# Allegro board c3x.brd
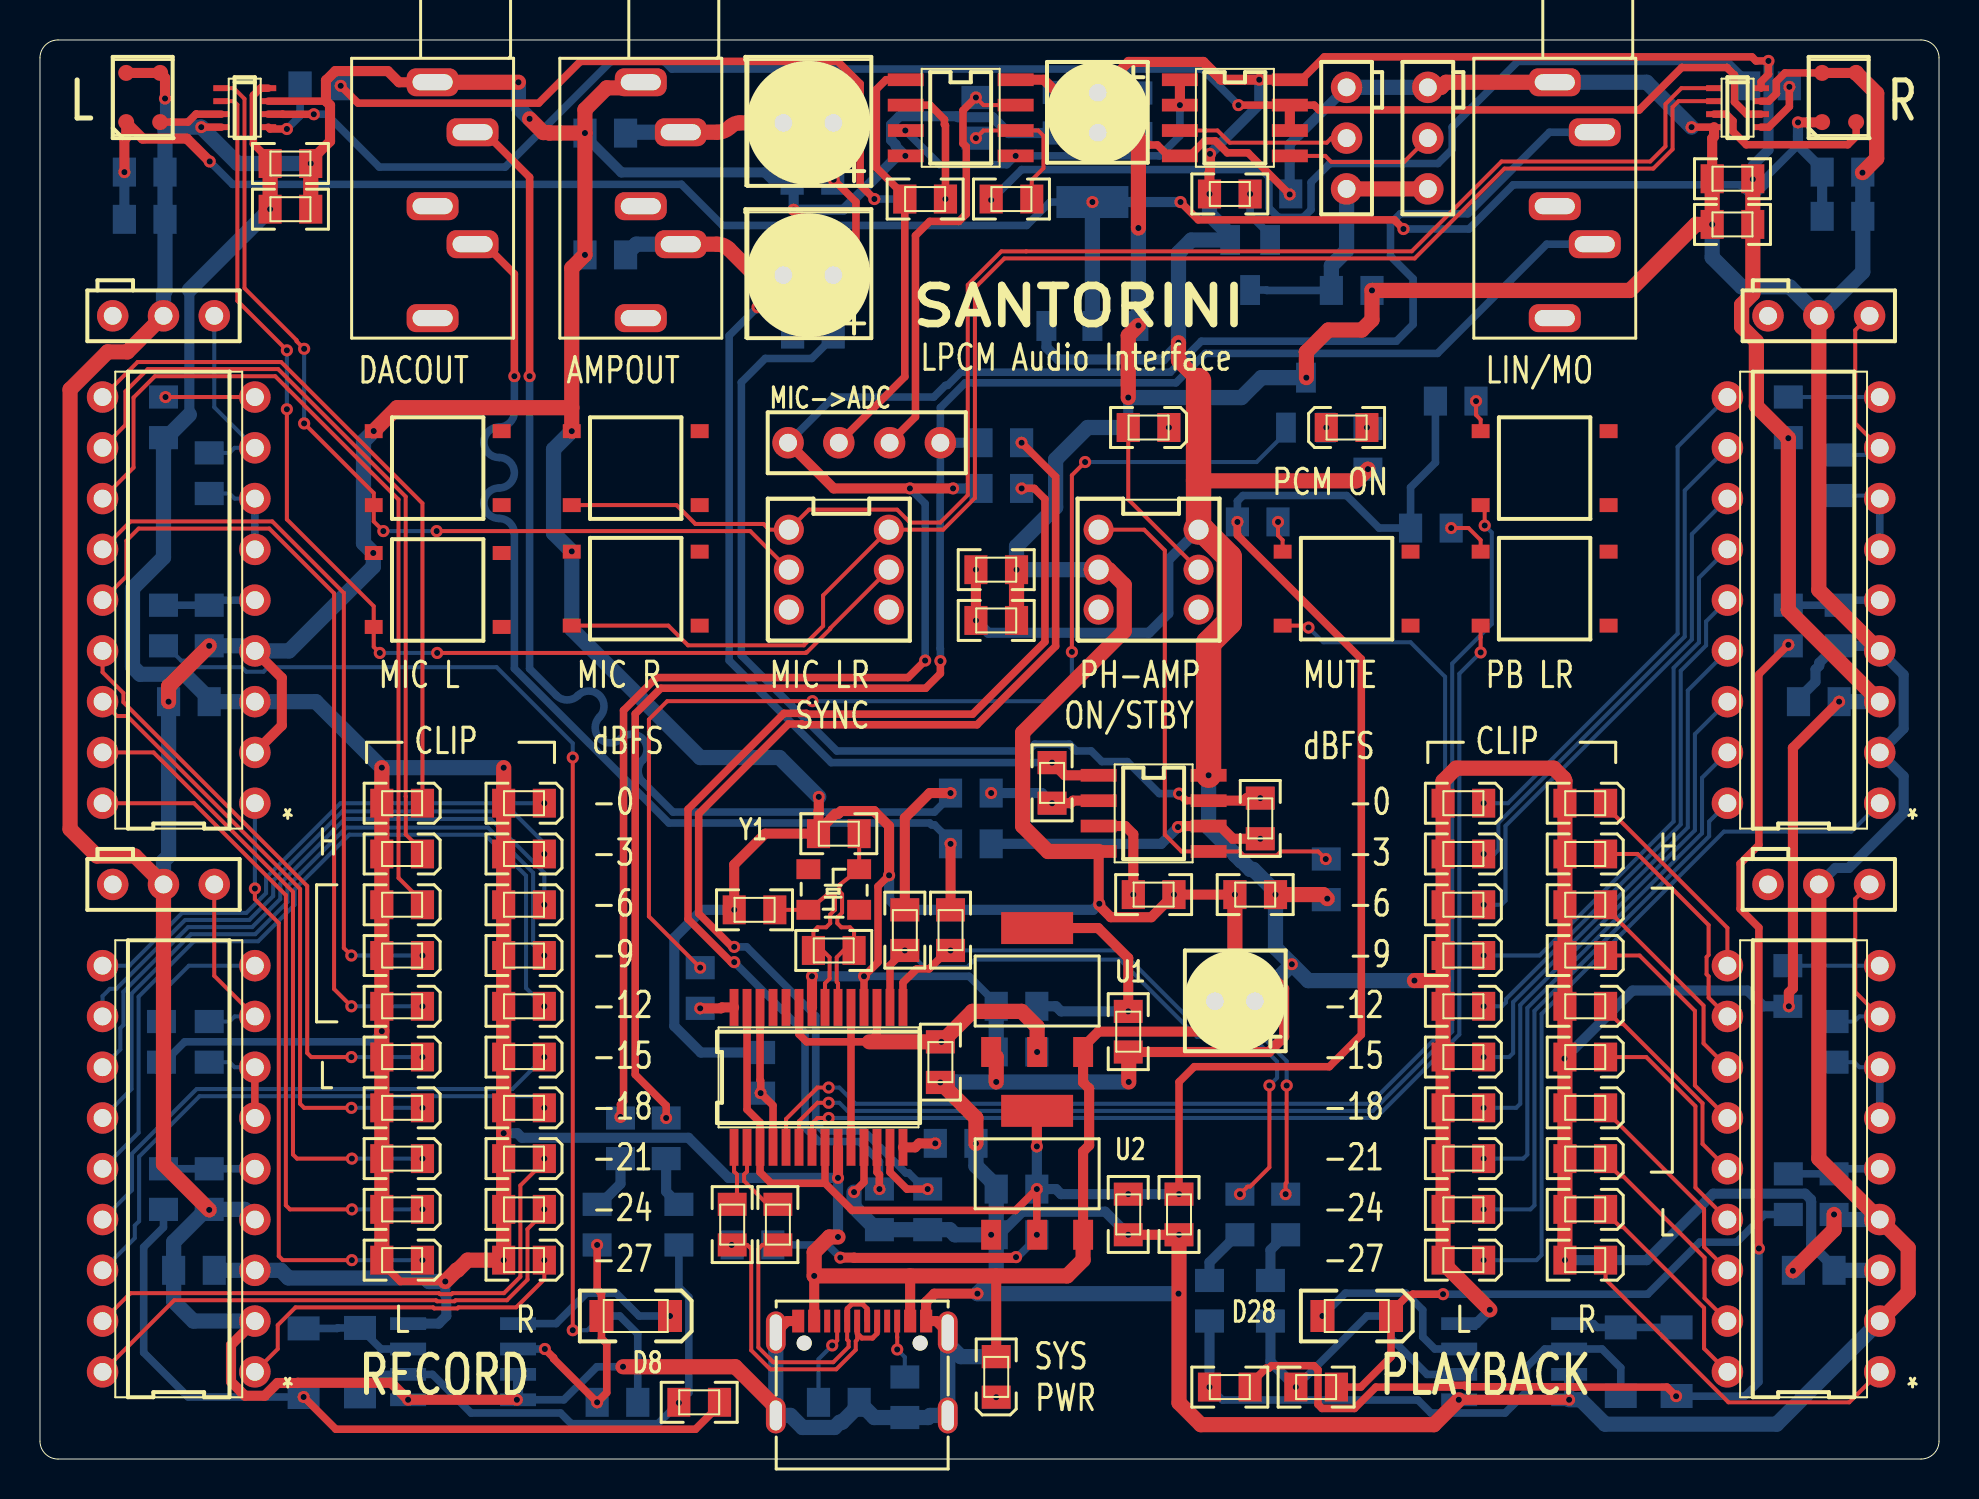
[diagram p0: board, top side]
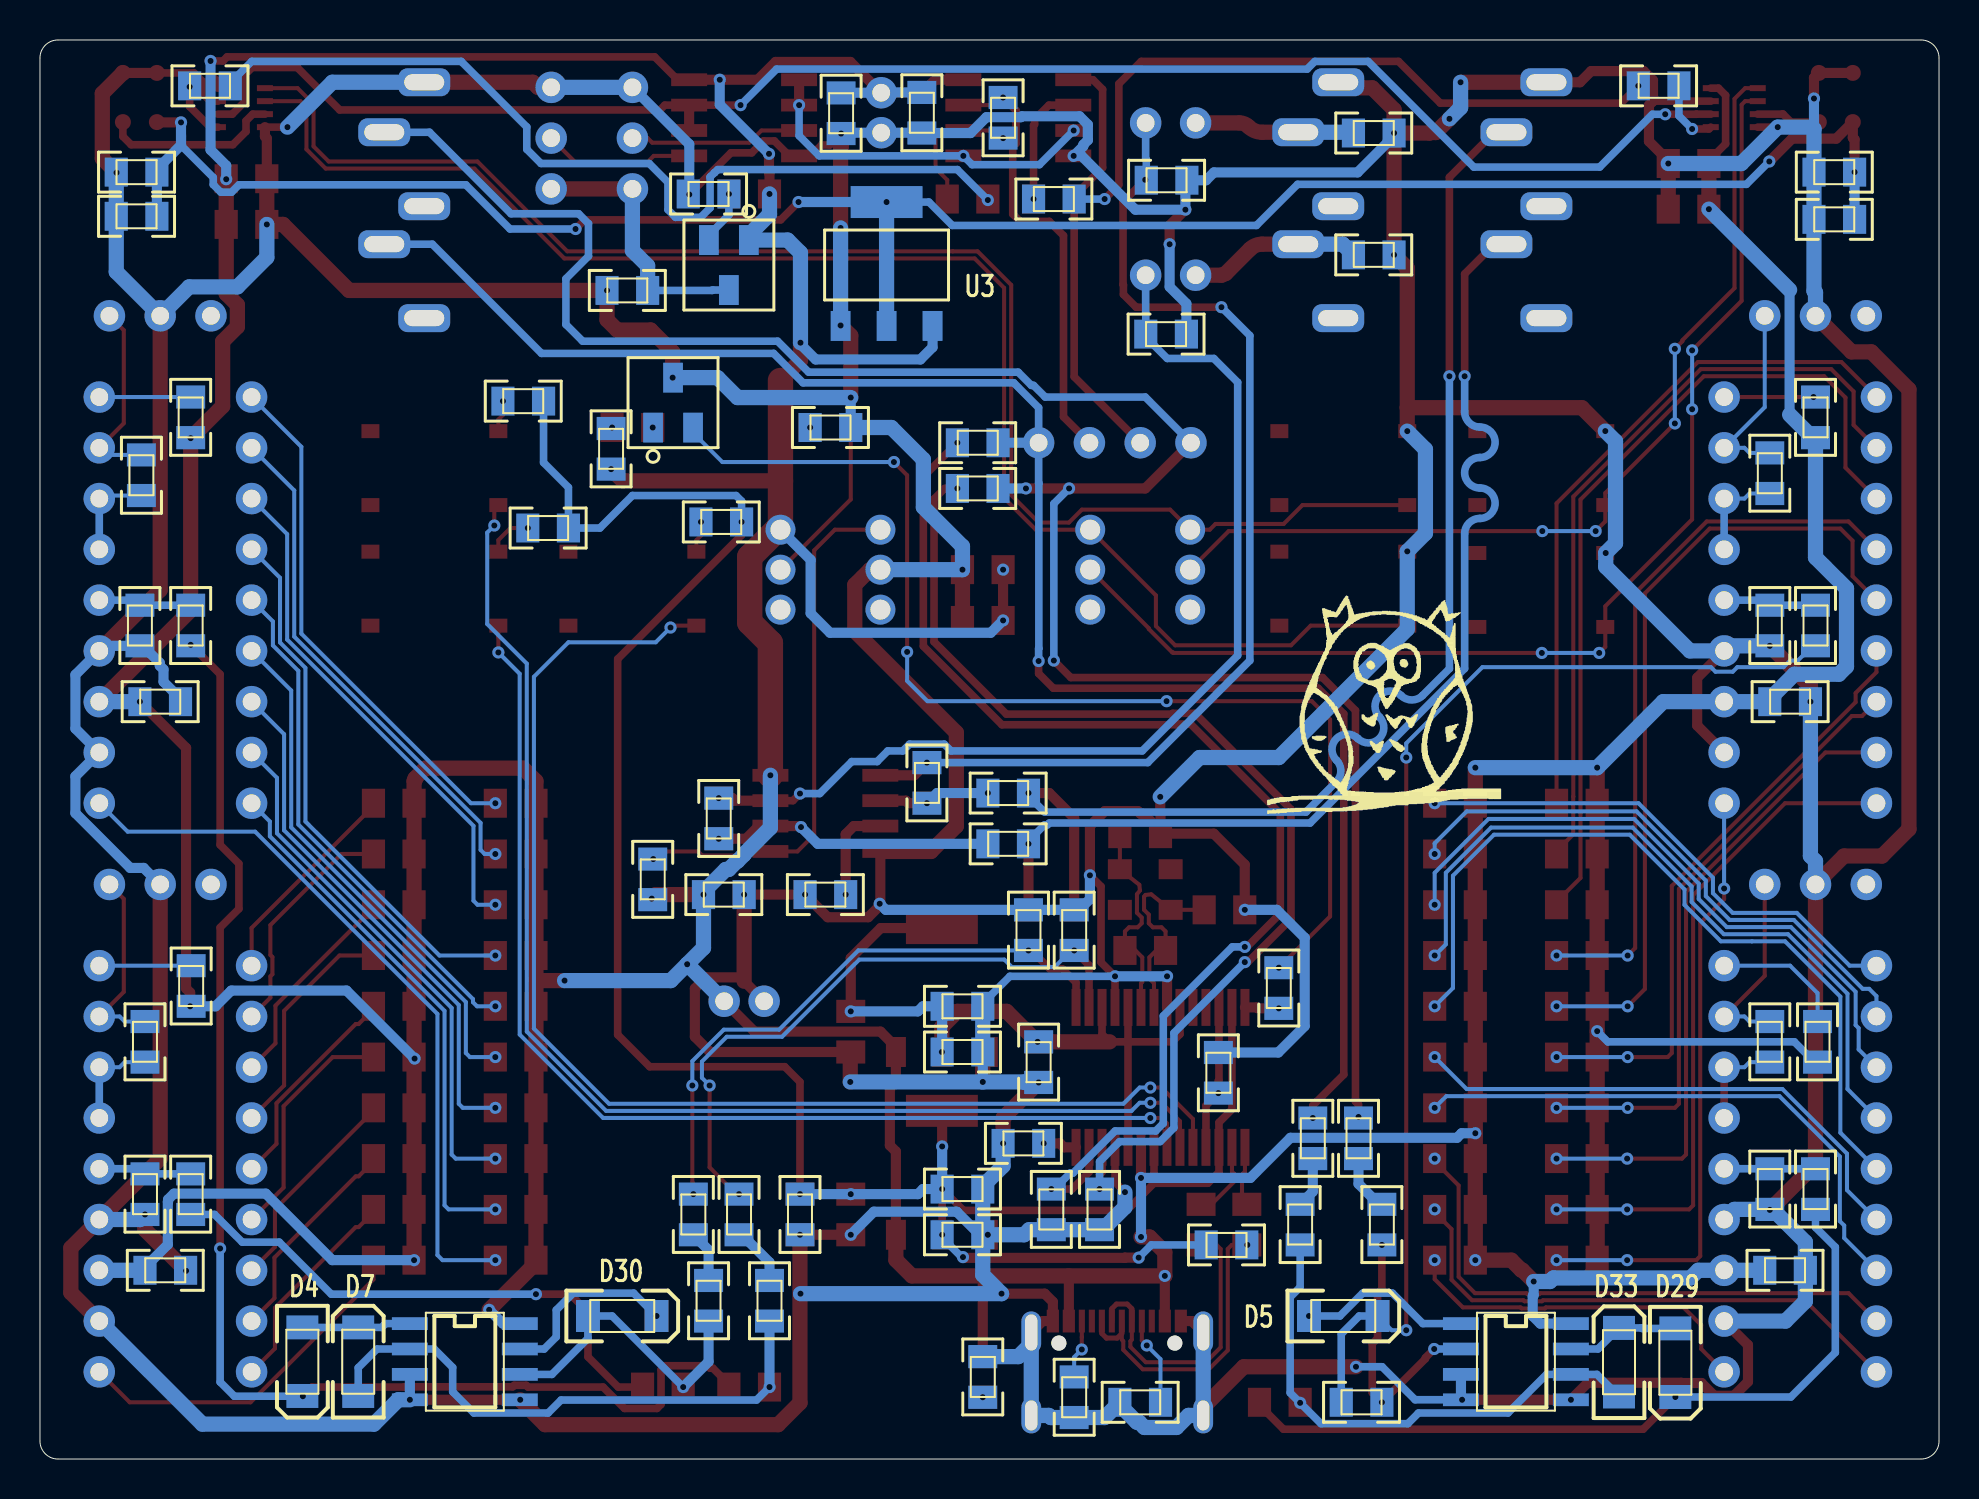
[diagram p1: board, bottom side, seen from below]

Outline 95 x 70.99 mm; copper layers: TOP, BOTTOM. Coordinates in mm from the lower left corner of the outline.
Outline path: 0,70.09 0,0.9 arc(0.26,0.26) 0.9,0 94.1,0 arc(94.73,0.26) 95,0.9 95,70.09 arc(94.73,70.73) 94.1,70.99 0.9,70.99 arc(0.26,70.73) 0,70.09

## Design rules (mm)
constraint set DEFAULT: min track width 0.203, pair gap 0.152
net group DP1: nets N368212 N368216
net group DP2: nets XTAL1 XTAL2
net group USB_D: nets USB_DN USB_DP

## Placement (name value [footprint] x y rotation side)
C1  5pF  [0805]  50.63 33.83 90 bottom
C3  1uF  [0805]  56.98 12.24 270 top
C4  0.1uF  [0805]  56.98 12.24 270 bottom
C5  220uF  [TH_CAP_D6_3]  38.44 66.85 180 top
C6  0.47uF  [0805]  43.26 26.46 90 top
C7  0.47uF  [0805]  45.55 26.46 90 top
C9  10uF  [0805]  54.44 21.38 270 top
C10  1uF  [0805]  45.04 19.86 270 top
C11  0.1uF  [0805]  45.04 19.86 270 bottom
C12  10uF  [0805]  48.85 20.36 180 bottom
C14  1uF  [0805]  48.85 22.65 180 bottom
C15  10uF  [0805]  48.85 11.22 180 bottom
C17  1uF  [0805]  48.85 13.51 180 bottom
C21  220uF  [TH_CAP_D6_3]  38.44 59.23 180 top
C22  10uF  [0805]  45.8 15.79 0 bottom
C23  30pF  [0805]  35.74 27.48 180 top
C24  5pF  [0805]  61.04 32.05 90 bottom
C25  10uF  [0805]  47.83 44.49 0 top
C26  10uF  [0805]  47.83 41.95 0 top
C31  30pF  [0805]  39.96 31.29 180 top
C32  1uF  [0805]  55.71 28.24 0 top
C33  0.1uF  [0805]  55.71 28.24 0 bottom
C34  100uF  [TH_CAP_D5]  59.77 22.9 180 top
C35  1uF  [0805]  60.79 28.24 180 bottom
C36  0.1uF  [0805]  60.79 28.24 180 top
C37  0.47uF  [0805]  14.03 68.7 0 bottom
C39  10uF  [0805]  61.55 63.29 0 bottom
C40  22uF  [0805]  65.61 58.46 0 bottom
C41  0.47uF  [0805]  48.09 48.56 0 bottom
C42  4.7uF  [0805]  90.16 64.38 0 bottom
C44  0.1uF  [0805]  90.16 62.17 0 bottom
C45  4.7uF  [0805]  12.53 64.81 0 top
C47  0.1uF  [0805]  12.53 62.53 0 top
C48  1uF  [0805]  54.92 67.33 270 bottom
C49  1uF  [0805]  50.88 67.35 270 bottom
C51  100uF  [TH_CAP_D5]  52.91 67.35 270 top
C54  0.47uF  [0805]  86.49 68.7 180 bottom
C55  0.47uF  [0805]  48.09 50.84 0 bottom
C60  4.7uF  [0805]  5.24 64.38 0 bottom
C62  0.1uF  [0805]  5.24 62.02 0 bottom
C63  4.7uF  [0805]  84.66 64.05 180 top
C65  0.1uF  [0805]  84.66 61.77 180 top
C66  1uF  [0805]  90 41.7 90 bottom
C67  1uF  [0805]  60.03 12.24 270 bottom
C68  1uF  [0805]  8.46 41.7 90 bottom
C69  1uF  [0805]  29.04 16.05 270 bottom
C70  1uF  [0805]  89.74 13.25 90 bottom
C71  1uF  [0805]  8.46 13.51 90 bottom
C72  1uF  [0805]  62.31 12.24 270 bottom
C73  1uF  [0805]  31.32 16.05 270 bottom
C74  0.1uF  [0805]  7.45 37.89 180 bottom
C75  1uF  [0805]  7.7 9.44 180 bottom
C78  0.1uF  [0805]  88.73 9.44 180 bottom
C79  1uF  [0805]  88.98 37.89 180 bottom
C81  10uF  [0805]  54.44 12.24 270 top
D1  PCM_ON  [0805D]  65.36 51.61 180 top
D2  AMP_ON  [0805D]  55.45 51.61 0 top
D3  PWR  [0805D]  47.83 4.11 270 top
D4  1N4148  [1206]  81.87 4.87 270 bottom
D5  1N4148  [1206]  29.8 7.16 180 bottom
D6  GRN  [0805D]  71.2 9.95 0 top
D7  1N4148  [1206]  79.08 4.87 90 bottom
D8  1N4148  [1206]  29.8 7.16 0 top
D9  GRN  [0805D]  71.2 12.49 0 top
D10  GRN  [0805D]  18.12 9.95 0 top
D11  GRN  [0805D]  18.12 12.49 0 top
D12  GRN  [0805D]  71.2 15.03 0 top
D13  GRN  [0805D]  18.12 15.03 0 top
D14  GRN  [0805D]  71.2 17.57 0 top
D15  GRN  [0805D]  18.12 17.57 0 top
D16  GRN  [0805D]  71.2 20.11 0 top
D17  GRN  [0805D]  18.12 20.11 0 top
D18  GRN  [0805D]  71.2 22.65 0 top
D19  GRN  [0805D]  18.12 22.65 0 top
D20  ORG  [0805D]  71.2 25.19 0 top
D21  ORG  [0805D]  18.12 25.19 0 top
D22  ORG  [0805D]  71.2 27.73 0 top
D23  ORG  [0805D]  18.12 27.73 0 top
D24  RED  [0805D]  71.2 30.27 0 top
D25  RED  [0805D]  18.12 30.27 0 top
D26  RED  [0805D]  71.2 32.81 0 top
D27  RED  [0805D]  18.12 32.81 0 top
D28  1N4148  [1206]  65.87 7.16 0 top
D29  1N4148  [1206]  13.19 4.82 270 bottom
D30  1N4148  [1206]  65.87 7.16 180 bottom
D31  GRN  [0805D]  77.3 9.95 0 top
D32  GRN  [0805D]  24.21 9.95 0 top
D33  1N4148  [1206]  16.01 4.84 90 bottom
D34  GRN  [0805D]  77.3 12.49 0 top
D35  GRN  [0805D]  24.21 12.49 0 top
D36  GRN  [0805D]  77.3 15.03 0 top
D37  GRN  [0805D]  77.3 17.57 0 top
D38  GRN  [0805D]  24.21 15.03 0 top
D39  GRN  [0805D]  24.21 17.57 0 top
D40  GRN  [0805D]  77.3 20.11 0 top
D41  GRN  [0805D]  24.21 20.11 0 top
D42  GRN  [0805D]  77.3 22.65 0 top
D43  GRN  [0805D]  24.21 22.65 0 top
D44  ORG  [0805D]  77.3 25.19 0 top
D45  ORG  [0805D]  24.21 25.19 0 top
D46  ORG  [0805D]  77.3 27.73 0 top
D47  ORG  [0805D]  24.21 27.73 0 top
D48  RED  [0805D]  77.3 30.27 0 top
D49  RED  [0805D]  24.21 30.27 0 top
D50  RED  [0805D]  77.3 32.81 0 top
D51  RED  [0805D]  24.21 32.81 0 top
FB1  0R  [0805]  36.05 19.32 90 bottom
J1  USB_TYPEC  [USB-C]  37.93 6.9 0 top
J2  LINE_OUT  [PJ215]  19.64 68.88 270 top
J3  HEADPHONE_OUT  [PJ215]  30.05 68.88 270 top
J4  MIC_CONN  [H2_54-4]  41.23 50.84 90 top
J5  LINE_IN_MIC_OUT  [PJ215]  75.77 68.88 270 top
K1  DAC_MUTE  [KEY0404MM]  65.36 43.54 0 top
K2  MIC_UP_L  [KEY0404MM]  19.89 49.57 0 top
K3  MIC_UP_R  [KEY0404MM]  29.8 49.57 0 top
K4  DAC_UP  [KEY0404MM]  75.27 49.57 0 top
K5  MIC_DOWN_L  [KEY0404MM]  19.89 43.48 0 top
K6  MIC_DOWN_R  [KEY0404MM]  29.8 43.54 0 top
K7  DAC_DOWN  [KEY0404MM]  75.27 43.54 0 top
K8  MIC_LR_SYNC  [DPDT0707MM]  39.96 44.49 0 top
K9  AMP_ON  [DPDT0707MM]  55.45 44.49 0 top
MK1  SPU0410HR5H-PB  [SISONIC-4]  5.16 68.12 180 top
MK2  SPU0410HR5H-PB  [SISONIC-4]  90 68.12 180 top
NOREF  -  []  -140.89 -36.53 0 top
Q1  2N5830/TO  [SOT23]  60.53 59.73 0 bottom
Q3  2N3906  [SOT23]  63.33 52.85 180 bottom
R1  4.7k  [0805]  38.64 63.97 0 bottom
R2  22  [0805]  36.91 11.73 270 top
R3  5.1k  [0805]  43.26 3.09 90 bottom
R4  5.1k  [0805]  39.96 2.84 180 bottom
R5  22  [0805]  34.63 11.73 270 top
R6  20k  [0805]  50.63 33.83 270 top
R7  20k  [0805]  46.56 33.32 180 bottom
R8  1k  [0805]  28.28 66.34 180 bottom
R9  20k  [0805]  46.56 30.78 180 bottom
R10  4.7k  [0805]  38.67 56.28 0 bottom
R11  20k  [0805]  61.04 32.05 270 top
R12  1k  [0805]  28.28 60.24 180 bottom
R13  1.5k  [0805]  35.64 10.71 0 bottom
R14  100k  [0805]  43.26 26.46 270 bottom
R15  1M  [0805]  39.71 25.44 180 top
R16  100k  [0805]  45.55 26.46 270 bottom
R17  1.5k  [0805]  60.92 46.88 0 bottom
R18  20k  [0805]  44.28 63.04 0 top
R19  1.5k  [0805]  70.82 52.93 0 bottom
R20  100k  [0805]  59.52 63.29 180 top
R21  10k  [0805]  44.28 63.04 180 bottom
R22  20k  [POT2_54]  65.36 66.08 0 top
R24  1.5k  [0805]  69.58 46.58 0 bottom
R26  1k  [0805]  66.43 50.54 270 bottom
R27  20k  [POT2_54]  69.42 66.08 0 top
R28  20k  [0805]  46.82 67.1 270 bottom
R29  10k  [0805]  33.03 23.56 270 bottom
R30  10k  [0805]  48.6 63.04 180 top
R32  10k  [0805]  64.34 29 90 bottom
R33  100k  [0805]  41.99 12.49 90 bottom
R34  1k  [0805]  47.83 4.11 90 bottom
R35  1k  [0805]  55.45 51.61 180 bottom
R36  100k  [0805]  44.41 12.49 90 bottom
R37  100k  [0805]  59.52 3.6 0 top
R38  100k  [0805]  28.89 2.84 0 bottom
R39  100k  [0805]  87.46 41.7 270 bottom
R40  100k  [0805]  6.18 41.7 270 bottom
R41  1k  [POT2_54]  88.98 57.19 90 top
R42  820  [0805]  89.92 49.22 90 bottom
R43  1k  [POT2_54]  6.18 57.19 90 top
R44  820  [0805]  8.46 49.32 90 bottom
R45  10k  [0805]  58.5 7.92 270 bottom
R46  10k  [0805]  27.87 11.73 270 bottom
R47  0  [0805]  87.46 52.11 270 bottom
R48  0  [0805]  6.18 52.11 270 bottom
R49  100k  [0805]  63.84 3.6 0 top
R50  100k  [0805]  32.98 2.84 0 top
R51  100k  [0805]  87.46 13.25 270 bottom
R52  100k  [0805]  6.18 13.51 270 bottom
R53  1k  [POT2_54]  88.98 28.75 90 top
R54  820  [0805]  89.74 20.87 90 bottom
R55  1k  [POT2_54]  6.18 28.75 90 top
R56  820  [0805]  8.46 20.87 90 bottom
R57  10k  [0805]  61.55 7.92 270 bottom
R58  10k  [0805]  31.96 11.73 270 bottom
R59  0  [0805]  87.43 23.67 270 bottom
R60  0  [0805]  6.08 20.87 270 bottom
U1  AMS1117  [SOT223]  47.58 20.36 0 top
U2  AMS1117  [SOT223]  47.58 11.22 0 top
U3  AMS1117  [SOT223]  54.95 56.69 180 bottom
U4  PCM2903C  [SSOP28-W]  38.94 19.09 90 top
U5  TPA6111A2  [SOP8]  55.71 32.3 0 top
U6  AD5228  [SOT23-8]  10.24 67.61 0 top
U10  AD5228  [SOT23-8]  84.92 67.61 0 top
U12  LM3915  [DIP18]  88.22 42.97 180 top
U13  LM3915  [DIP18]  6.94 42.97 180 top
U16  LM3915  [DIP18]  6.94 14.52 180 top
U17  LM3915  [DIP18]  88.22 14.52 180 top
U19  NJM4580  [SOP8]  46.06 67.1 0 top
U20  AD8606  [SOP8]  59.77 67.1 0 top
U21  LM358  [SOP8]  73.74 4.87 180 bottom
U22  LM358  [SOP8]  21.16 4.87 180 bottom
Y1  12MHz  [OSC3225]  40.98 29.51 270 top

## Library data of the parts
C1 C3 C4 C6 C7 C9-C12 C14 C15 C17 C22-C26 C31-C33 C35-C37 C39-C42 C44 C45 C47-C49 C54 C55 C60 C62 C63 C65-C75 C78 C79 C81 = CAP NP
C5 C21 C34 C51 = CAP
D1-D3 D6 D9-D27 D31 D32 D34-D51 = LED_P
D4 D5 D7 D8 D28-D30 D33 = 1N4148
FB1 = FERRITE_BEAD
J1 = USB_TYPEC_FEMALE
J2 J3 J5 = STEREO_PJ215
J4 = HEADER_4PIN
K1-K7 = KEY_2PIN
K8 K9 = KEY_DPDT
MK1 MK2 = SPU0410HR5H-PB
Q1 = 2N5830/TO
Q3 = 2N3906
R1-R21 R24 R26 R28-R30 R32-R40 R42 R44-R52 R54 R56-R60 = RESISTOR
R22 R27 R41 R43 R53 R55 = POT
U1-U3 = AMS1117
U4 = PCM2903C
U5 = TPA6111A2
U6 U10 = AD5228
U12 U13 U16 U17 = LM3915
U19 = NJM4580
U20 = AD8606
U21 U22 = LM358
Y1 = CRYSTAL

## Footprints (pads in the part's own frame, mm; a bottom-side part is the same pattern mirrored in y, then rotated)
0805
  rect 1.16x1.45 smd: 1(-1.016,0) 2(1.016,0)
0805D
  rect 1.16x1.45 smd: 1(-1.016,0) 2(1.016,0)
1206
  rect 1.2x1.6 smd: 1(-1.715,0) 2(1.715,0)
DIP18
  round 1.575 hole 0.889: 1(-3.81,10.16) 2(-3.81,7.62) 3(-3.81,5.08) 4(-3.81,2.54) 5(-3.81,0) 6(-3.81,-2.54) 7(-3.81,-5.08) 8(-3.81,-7.62) 9(-3.81,-10.16) 10(3.81,-10.16) 11(3.81,-7.62) 12(3.81,-5.08) 13(3.81,-2.54) 14(3.81,0) 15(3.81,2.54) 16(3.81,5.08) 17(3.81,7.62) 18(3.81,10.16)
DPDT0707MM
  round 1.5 hole 1: 1(-2.5,2) 2(-2.5,0) 3(-2.5,-2) 4(2.5,-2) 5(2.5,0) 6(2.5,2)
H2_54-4
  round 1.575 hole 0.889: 1(0,3.81) 2(0,1.27) 3(0,-1.27) 4(0,-3.81)
KEY0404MM
  rect 0.9x0.7 smd: (3.2,1.85) (3.2,-1.85) 1(-3.2,1.85) 2(-3.2,-1.85)
OSC3225
  rect 1x1.2 smd: (0,-2.54) (2.032,0) 1(0,0) 2(2.032,-2.54)
PJ215
  rrect 1.4x2.6 hole 0.8x2: 1(0,0) 2(8.1,2) 3(2.5,2) 4(6.2,0) 5(11.8,0)
POT2_54
  round 1.575 hole 0.889: 1(0,2.54) 2(0,0) 3(0,-2.54)
SISONIC-4
  round 0.8 smd: 1(0.85,1.23) 2(0.85,-1.23) 3(-0.85,-1.23) 4(-0.85,1.23)
SOP8
  rect 1.8x0.64 smd: 1(-2.75,1.905) 2(-2.75,0.635) 3(-2.75,-0.635) 4(-2.75,-1.905) 5(2.75,-1.905) 6(2.75,-0.635) 7(2.75,0.635) 8(2.75,1.905)
SOT23
  rect 0.991x1.499 smd: 1(-1,-1.25) 2(1,-1.25) 3(0,1.25)
SOT23-8
  rect 0.8x0.3 smd: 1(-1.175,0.975) 2(-1.175,0.325) 3(-1.175,-0.325) 4(-1.175,-0.975) 5(1.175,-0.975) 6(1.175,-0.325) 7(1.175,0.325) 8(1.175,0.975)
SOT223
  rect 1x1.5 smd: 1(0,0) 2(2.3,0) 3(4.6,0)
  rect 3.6x1.6 smd: 4(2.3,6.2)
SSOP28-W
  rect 1.85x0.45 smd: 1(-3.5,4.225) 2(-3.5,3.575) 3(-3.5,2.925) 4(-3.5,2.275) 5(-3.5,1.625) 6(-3.5,0.975) 7(-3.5,0.325) 8(-3.5,-0.325) 9(-3.5,-0.975) 10(-3.5,-1.625) 11(-3.5,-2.275) 12(-3.5,-2.925) 13(-3.5,-3.575) 14(-3.5,-4.225) 15(3.5,-4.225) 16(3.5,-3.575) 17(3.5,-2.925) 18(3.5,-2.275) 19(3.5,-1.625) 20(3.5,-0.975) 21(3.5,-0.325) 22(3.5,0.325) 23(3.5,0.975) 24(3.5,1.625) 25(3.5,2.275) 26(3.5,2.925) 27(3.5,3.575) 28(3.5,4.225)
TH_CAP_D5
  round 1.575 hole 0.889: 1(-1,0) 2(1,0)
TH_CAP_D6_3
  round 1.575 hole 0.889: 1(-1.25,0) 2(1.25,0)
USB-C
  round 0.76 hole 0.75: (0.3,-1.1) (6.1,-1.1)
  oval 0.991x2.108 hole 0.61x1.803: 1(-1.12,-0.57) 4(7.48,-0.57)
  oval 0.991x1.803 hole 0.61x1.499: 2(-1.12,-4.72) 3(7.48,-4.72)
  rect 0.61x1.143 smd: A1(0,0) A4(0.8,0) B1(6.4,0) B4(5.6,0)
  rect 0.305x1.143 smd: A5(1.95,0) A6(2.95,0) A7(3.45,0) A8(1.45,0) B5(4.95,0) B6(3.95,0) B7(2.45,0) B8(4.45,0)

## Nets
GND: C3.2 C4.2 C9.2 C10.2 C11.2 C12.2 C14.2 C15.2 C17.2 C22.2 C23.2 C25.2 C26.2 C31.2 C32.2 C33.2 C34.2 C35.2 C36.2 C39.2 C40.2 C42.2 C44.2 C45.2 C47.2 C48.2 C49.2 C51.2 C60.2 C62.2 C63.2 C65.2 C66.1 C68.1 C70.1 C71.1 C74.2 C75.2 C78.2 C79.2 C81.2 FB1.2 J1.1 J1.2 J1.3 J1.4 J1.A1 J1.B1 J2.1 J3.1 J5.1 K2.1 K3.1 K5.1 K6.1 K9.2 MK1.2 MK1.3 MK2.2 MK2.3 Q3.3 R1.1 R3.1 R4.1 R8.2 R10.1 R12.2 R14.1 R16.1 R22.1 R27.1 R33.1 R34.2 R35.2 R36.1 R41.2(WIPER) R43.2(WIPER) R53.2(WIPER) R55.2(WIPER) U1.1 U2.1 U3.1 U4.11 U4.18 U4.22 U5.4 U6.4 U6.7 U10.4 U10.7 U12.2(V-) U12.4 U13.2(V-) U13.4 U16.2(V-) U16.4 U17.2(V-) U17.4 U19.4 U20.4 U21.3 U21.4 U21.5 U22.3 U22.4 U22.5
VBUS: C25.1 C26.1 C34.1 C35.1 C36.1 C45.1 C47.1 C48.1 C49.1 C51.1 C63.1 C65.1 C74.1 C75.1 C78.1 C79.1 D3.1 D6.1 D9.1 D10.1 D11.1 D12.1 D13.1 D14.1 D15.1 D16.1 D17.1 D18.1 D19.1 D20.1 D21.1 D22.1 D23.1 D24.1 D25.1 D26.1 D27.1 D31.1 D32.1 D34.1 D35.1 D36.1 D37.1 D38.1 D39.1 D40.1 D41.1 D42.1 D43.1 D44.1 D45.1 D46.1 D47.1 D48.1 D49.1 D50.1 D51.1 J1.A4 J1.B4(VBUS#B4) K9.6 Q1.1 R20.2 R26.2 R32.1 R47.2 R48.2 R59.2 R60.2 U1.3 U2.3 U3.3 U4.9 U5.8 U6.8 U10.8 U12.3 U13.3 U16.3 U17.3 U19.8 U20.8 U21.8 U22.8
VBUS_FILT: C40.1 Q1.3(E) R22.3 R27.3
VCC33A: C9.1 C10.1 C11.1 C12.1 C14.1 U1.2 U1.4(VOUT#4) U4.10 U4.17 U4.19 U4.23
VCC33D: C3.1 C4.1 C15.1 C17.1 C81.1 R13.2 R17.1 R19.1 R24.1 U2.2 U2.4(VOUT#4) U4.3 U4.8 U4.27
VCCMK: C42.1 C44.1 C60.1 C62.1 MK1.1(VDD) MK2.1(VDD) U3.2 U3.4(VOUT#4)
ADC_L: C41.2 R33.2 U4.12
ADC_R: C55.2 R36.2 U4.13
AMP_BYPS: C32.1 C33.1 U5.3
AMP_OFF: K9.1 R32.2 U5.5
AMP_VO1: C1.2 C5.1 R1.2 R6.1 U5.1
AMP_VO2: C21.1 C24.2 R10.2 R11.1 U5.7(VO2)
DAC_L: C6.1 C67.1 R14.2 U4.16
DAC_R: C7.1 C72.1 R16.2 U4.15
HID_MUTE: K1.2 U4.5
HID_VOL_DOWN: K7.2 U4.7
HID_VOL_UP: K4.2 U4.6
HP_L: C5.2 J3.3(5) R8.1
HP_R: C21.2 J3.2 R12.1
LO_L: C6.2 J2.3(5) R7.2
LO_R: C7.2 J2.2 R9.2
PCM_SSPND: R29.2 U4.28
PEAK_ADC_L: C68.2 R40.1 U13.5
PEAK_ADC_R: C71.2 R52.1 U16.5
PEAK_DAC_L: C66.2 R39.1 U12.5
PEAK_DAC_R: C70.2 R51.1 U17.5
REC_L: C41.1 C69.1 J4.1 J5.3(5)
REC_PD_L: K5.2 K8.5 U6.2
REC_PD_R: K6.2 K8.6 U10.2
REC_PU_L: K2.2 K8.2 U6.1
REC_PU_R: K3.2 K8.1 U10.1
REC_R: C55.1 C73.1 J4.4 J5.2
USB_CC1: J1.A5 R4.2
USB_CC2: J1.B5 R3.2
USB_DN: J1.A7 J1.B7 R2.2
USB_DP: J1.A6 J1.B6 R5.2 R13.1
VREF1650: U6.6 U10.6 U20.6 U20.7(AOUT)
VREF2500: U19.3 U19.5 U20.1 U20.2
VU_ADL_D1: D10.2(CATHODE) U13.1
VU_ADL_D2: D11.2(CATHODE) U13.18
VU_ADL_D3: D13.2(CATHODE) U13.17
VU_ADL_D4: D15.2(CATHODE) U13.16
VU_ADL_D5: D17.2(CATHODE) U13.15
VU_ADL_D6: D19.2(CATHODE) U13.14
VU_ADL_D7: D21.2(CATHODE) U13.13
VU_ADL_D8: D23.2(CATHODE) U13.12
VU_ADL_D9: D25.2(CATHODE) U13.11
VU_ADL_D10: D27.2(CATHODE) U13.10
VU_ADR_D1: D32.2(CATHODE) U16.1
VU_ADR_D2: D35.2(CATHODE) U16.18
VU_ADR_D3: D38.2(CATHODE) U16.17
VU_ADR_D4: D39.2(CATHODE) U16.16
VU_ADR_D5: D41.2(CATHODE) U16.15
VU_ADR_D6: D43.2(CATHODE) U16.14
VU_ADR_D7: D45.2(CATHODE) U16.13
VU_ADR_D8: D47.2(CATHODE) U16.12
VU_ADR_D9: D49.2(CATHODE) U16.11
VU_ADR_D10: D51.2(CATHODE) U16.10
VU_DAL_D1: D6.2(CATHODE) U12.1
VU_DAL_D2: D9.2(CATHODE) U12.18
VU_DAL_D3: D12.2(CATHODE) U12.17
VU_DAL_D4: D14.2(CATHODE) U12.16
VU_DAL_D5: D16.2(CATHODE) U12.15
VU_DAL_D6: D18.2(CATHODE) U12.14
VU_DAL_D7: D20.2(CATHODE) U12.13
VU_DAL_D8: D22.2(CATHODE) U12.12
VU_DAL_D9: D24.2(CATHODE) U12.11
VU_DAL_D10: D26.2(CATHODE) U12.10
VU_DAR_D1: D31.2(CATHODE) U17.1
VU_DAR_D2: D34.2(CATHODE) U17.18
VU_DAR_D3: D36.2(CATHODE) U17.17
VU_DAR_D4: D37.2(CATHODE) U17.16
VU_DAR_D5: D40.2(CATHODE) U17.15
VU_DAR_D6: D42.2(CATHODE) U17.14
VU_DAR_D7: D44.2(CATHODE) U17.13
VU_DAR_D8: D46.2(CATHODE) U17.12
VU_DAR_D9: D48.2(CATHODE) U17.11
VU_DAR_D10: D50.2(CATHODE) U17.10
XTAL1: C23.1 R15.2 U4.21 Y1.2
XTAL2: C31.1 R15.1 U4.20(XTO) Y1.1
N368212: R5.1 U4.1
N368216: R2.1 U4.2
N368937: K1.1 R17.2
N369524: K4.1 R19.2
N369632: K7.1 R24.2
N370784: FB1.1 U4.4 U4.26
N375078: C22.1 U4.14
N381398: C1.1 R6.2 R7.1 U5.2
N381406: C24.1 R9.1 R11.2 U5.6
N385645: D4.2 R37.2 R39.2
N385649: D7.1 R37.1 R45.2 U21.2
N385661: D4.1 D7.2 U21.1
N385748: C67.2 R45.1
N390153: R47.1 U12.9
N392729: R42.1 U12.6 U12.7
N394781: R41.3 R42.2 U12.8
N398230: D28.2 R49.2 R51.2
N398274: D30.1 R49.1 R57.2 U21.6
N398290: D28.1 D30.2 U21.7(AOUT)
N398848: C72.2 R57.1
N398910: R59.1 U17.9
N414849: D3.2(CATHODE) R34.1
N424969: MK1.4 U6.3
N428607: C37.1 U6.5(W)
N435350: C37.2 R21.2
N437586: D5.2 R38.2 R40.2
N437630: D8.1 R38.1 R46.2 U22.2
N437646: D5.1 D8.2 U22.1
N438198: C69.2 R46.1
N438260: R48.1 U13.9
N438518: D29.2 R50.2 R52.2
N438562: D33.1 R50.1 R58.2 U22.6
N438578: D29.1 D33.2 U22.7(AOUT)
N439118: C73.2 R58.1
N439180: R60.1 U16.9
N493207: R18.2 R21.1 U19.2
N493759: J4.2 R18.1 U19.1
N495972: R28.2 R30.1 U19.6
N495980: J4.3 R28.1 U19.7(AOUT)
N496124: MK2.4 U10.3
N496194: C54.1 U10.5(W)
N496198: C54.2 R30.2
N522042: C39.1 Q1.2 R20.1
N529139: Q3.2 R29.1
N529191: D1.2(CATHODE) Q3.1(EMITTER)
N529733: D1.1 R26.1
N534103: R22.2(WIPER) U20.3
N535581: R27.2(WIPER) U20.5
N549531: D2.2(CATHODE) R35.1
N551342: D2.1 K9.5
N611370: R53.3 R54.2 U17.8
N611382: R54.1 U17.6 U17.7
N612780: R43.3 R44.2 U13.8
N612792: R44.1 U13.6 U13.7
N613572: R55.3 R56.2 U16.8
N613584: R56.1 U16.6 U16.7

Pads without a net: J1 A8 B8; J2 4 5; J3 4 5; J5 4 5; K8 3 4; K9 3 4; R41 1; R43 1; R53 1; R55 1; U4 24 25

## Via types
v1: diameter 0.61, hole 0.305, TOP to BOTTOM, 229 vias

## Routing (per net, layer and track width the routed paths; a pad name or vN(x,y) marks a point on that pad's centre or on a via; arc(x,y) is an arc through that point)
GND: length 728.3
  TOP w0.381: U4.18 v1(41.22,24.15) 41.92,24.85 41.92,28.65 v1(42.48,29.2) ; U4.11 41.22,13.85 v1(40.72,13.35) ; MK2.2 87.29,69.35 86.86,68.92 86.86,68.32 86.48,67.93 U10.7 ; 14.31,67.93 U6.7 ; v1(62.52,63.26) 60.43,65.35 59.39,65.35 58.8,65.94 58.26,65.94 57.51,65.19 U20.4 56.44,65.19 55.9,65.74 55.49,65.74 v1(54.92,66.31) ; U6.4 v1(8.07,66.63) ; v1(82.62,66.63) U10.4
  TOP w0.508: v1(59.77,28.24) v1(56.72,28.24) 55.59,27.11 53.56,27.11 52.96,27.71 U5.4 ; v1(23.86,2.96) v1(18.41,2.96) 17.56,3.81 12.89,3.81 12.88,3.8 11.88,3.8 11.25,3.17 10.26,3.17 9.56,3.87 9.56,5.71 U16.2 ; U13.4 12.1,39.08 12.1,36.7 U13.2 ; MK2.2 MK2.3 ; J1.A1 37.38,6.9 J1.1 ; K5.1 v1(16.67,45.33) ; U10.4 83.74,66.16 83.65,66.07 C63.2 ; v1(13.54,64.81) 13.54,64.96 14.51,65.92 14.51,67.73 14.31,67.93 14.31,68.97 14.33,68.99 14.33,68.99 14.77,69.44 17.4,69.44 17.96,68.88 J2.1 ; v1(76.49,2.96) v1(70.97,2.96) ; v1(34.73,27.48) 34.73,29.74 36.28,31.29 C31.2 38.94,31.43 ; v1(37.7,62.5) 38.49,61.71 v1(38.49,60.77) ; v1(38.62,24.15) 38.62,22.6 U4.22 ; v1(54.44,11.22) v1(56.98,11.22) ; v1(38.96,33.13) 38.96,32.4 38.94,32.39 38.94,31.43 ; 38.94,31.43 39.79,32.28 39.94,32.28 40.08,32.42 41.72,32.42 42.48,31.67 v1(42.48,29.2) ; v1(6.25,68.06) 6.25,69.1 MK1.3 MK1.2 ; C9.2 61.47,20.36 62.24,21.13 62.24,23.54 61.68,24.1 59.97,24.1 C34.2 ; v1(46.89,8.27) 44.74,8.27 44.33,7.87 J1.B1 44.84,6.9 J1.4
  TOP w0.762: 26.6,52.6 17.86,52.6 v1(16.69,51.43) ; 26.6,52.6 26.6,59.58 v1(27.26,60.24) v1(27.26,66.34) ; 26.6,52.6 v1(26.6,51.42) ; R27.1 70.09,68.62 70.34,68.88 J5.1 ; R53.2 88.98,15.03 U17.4 93.45,10.56 93.45,8.32 U17.2 ; v1(63.35,54.1) 63.35,55.38 64.45,56.48 66.12,56.48 66.63,56.99 v1(66.63,58.46) 79.53,58.46 82.84,61.77 v1(83.65,61.77) C63.2 ; v1(23.93,68.88) J2.1 ; U12.4 88.98,43.48 R41.2 ; J3.1 29.78,68.6 28.35,68.6 27.26,67.51 v1(27.26,66.34) ; v1(47.83,18.86) 47.83,20.11 U1.1 ; v1(54.46,18.86) 54.46,20.34 C9.2 ; 59.77,23.9 v1(59.77,28.24) ; v1(27.26,66.34) 25.48,66.34 25.46,66.36 25.18,66.36 v1(24.49,67.05) ; v1(46.82,15.79) 46.82,17.06 v1(45.04,18.84) ; v1(54.95,56.71) 54.44,56.2 v1(54.44,53.1) ; v1(89.74,12.24) 89.74,11.47 v1(87.69,9.42) ; v1(56.98,11.22) 56.98,2.81 58.07,1.72 69.73,1.72 v1(70.97,2.96) ; K9.2 53.48,44.49 54.24,43.73 54.24,41.42 49.16,36.34 49.16,31.67 50.43,30.4 U5.4 ; MK2.3 91.88,68.32 91.88,65.07 v1(91.17,64.36) ; v1(6.43,37.89) 6.43,38.65 v1(8.46,40.68) ; v1(29.17,4.62) 34.78,4.62 36.81,2.59 J1.2 ; v1(54.92,66.31) 54.92,65.63 54.95,65.6 v1(54.95,61.59) ; v1(48.85,44.49) C26.2 ; v1(13.54,64.81) C47.2 ; R43.2 4.38,55.39 3.38,55.39 1.5,53.51 1.5,31.51 2.85,30.17 4.76,30.17 R55.2 6.18,14.75 v1(8.46,12.46)
  BOTTOM w0.381: v1(23.86,2.96) U22.4 26.21,2.96 27.86,4.62 v1(29.17,4.62) ; v1(41.22,24.15) 46.48,24.15 47.83,22.79 C14.2
  BOTTOM w0.508: Q3.3 v1(63.35,54.1) ; C12.2 v1(47.83,18.86) ; v1(42.48,29.2) 42.48,28.01 43.01,27.48 R14.1 R16.1 52.69,27.48 v1(52.99,27.78) ; U22.4 U22.3 ; R10.1 37.65,57.8 38.49,58.64 v1(38.49,60.77) ; R22.1 62.52,65.78 v1(62.52,63.26) ; C15.2 47.83,11.36 48.13,11.36 49.12,12.35 49.14,12.37 53.28,12.37 v1(54.44,11.22) ; C79.2 87.97,38.03 88.82,38.88 88.82,39.5 89,39.69 89,39.83 89.85,40.68 C66.1 91.78,40.68 U12.4 93.22,39.24 93.22,36.54 U12.2 93.22,34.16 93.22,32.31 90.48,29.57 89.81,29.57 R53.2 ; v1(54.92,66.31) 54.88,66.35 C51.2 50.9,66.35 C49.2 48.44,66.34 47.65,67.13 45.93,67.13 45.88,67.18 42.99,67.18 42.58,66.76 42.58,65.98 42.81,65.75 42.81,65.68 v1(43.29,65.19) 42.89,65.19 40.2,62.5 v1(37.7,62.5) 37.7,63.9 R1.1 36.66,63.97 36.27,64.37 29.08,64.37 27.26,66.19 v1(27.26,66.34) ; v1(34.73,27.48) 33.13,27.48 31.73,26.08 31.73,21.66 33.05,20.34 FB1.2 ; v1(41.22,24.15) v1(38.62,24.15) ; 45.41,5.77 J1.4 ; 6.25,66.54 v1(6.25,68.06) ; R35.2 v1(54.44,53.1) ; U21.3 v1(76.49,2.96)
  BOTTOM w0.762: U16.4 10.24,12.49 C71.1 8.32,12.49 6.69,10.86 C75.2 6.69,7.89 7.68,6.9 U16.2 ; K9.2 v1(48.85,44.49) 48.85,45.66 50.81,47.62 50.81,50 52.41,51.61 R35.2 ; v1(13.54,64.81) 9.89,64.81 v1(8.07,66.63) 6.35,66.63 6.25,66.54 C60.2 C62.2 6.25,58.44 6.18,58.36 R43.2 ; v1(6.43,37.89) 6.43,30.17 6.18,29.91 R55.2 ; v1(40.72,13.35) 40.72,12.6 41.85,11.47 R33.1 R36.1 45.51,11.47 45.77,11.22 v1(47.58,11.22) ; v1(76.49,2.96) 77.07,2.96 78.29,1.74 86.87,1.74 U17.2 ; Q3.3 61.1,54.1 60.1,53.1 v1(54.44,53.1) ; v1(16.69,51.43) 16.18,50.92 16.18,45.82 v1(16.67,45.33) 16.67,44.64 12.46,40.43 U13.4 10.5,40.68 v1(8.46,40.68) ; v1(56.95,8.27) v1(46.89,8.27) 47.83,9.21 C15.2 ; R34.2 46.06,5.12 45.41,5.77 J1.3 44.53,2.18 44.43,2.08 R3.1 41.74,2.08 R4.1 40.98,2.69 40.13,1.84 40.01,1.84 39.75,1.58 38.14,1.58 37.54,2.18 J1.2 J1.1 ; v1(54.46,18.86) v1(47.83,18.86) 45.75,18.86 45.73,18.84 v1(45.04,18.84) ; C42.2 C44.2 91.18,59.39 R41.2 87.53,58.64 85.12,58.64 83.65,60.11 v1(83.65,61.77) ; v1(46.82,15.79) 46.82,14.67 47.83,13.65 C17.2 47.83,11.36 ; v1(54.95,56.71) v1(54.95,61.59) ; v1(23.93,68.88) 23.93,67.61 v1(24.49,67.05) ; v1(26.6,51.42) 25.69,50.51 25.69,46.32 v1(26.6,45.41) 26.6,41.52 33.03,35.1 36.99,35.1 v1(38.96,33.13) ; v1(82.62,66.63) 80.37,68.88 J5.1 ; C14.2 C12.2 ; R22.1 R27.1 ; U17.4 90,11.98 v1(89.74,12.24)
VBUS: length 495.7
  TOP w0.381: U6.8 11.03,68.58 10.67,68.22 10.67,65.8 11.51,64.96 C45.1 ; U20.8 63.1,69 64.25,70.15 85.64,70.15 85.84,69.94 v1(86.46,69.94) 86.46,69.27 86.09,68.9 U10.8 ; D10.1 17.1,9.8 18.02,8.88 v1(20.28,8.88)
  TOP w0.508: 43.53,9.16 J1.B4 ; v1(39.92,14.06) U4.9 ; 39.92,11.1 v1(39.92,11.11) ; v1(38.73,9.16) J1.A4 ; U2.3 52.18,15.39 52.48,15.69 52.48,18.53 52.18,18.84 U1.3 52.18,20.61 52.95,21.38 59.25,21.38 C34.1 ; 47.83,9.16 D3.1 ; v1(58.53,65.3) 58.53,64.36 58.5,64.33 v1(58.5,63.29) ; v1(87.48,22.65) 87.48,23.33 87.69,23.54 87.69,35.58 v1(90,37.89) ; v1(46.82,44.49) v1(46.82,41.95) ; U19.8 50.21,69 50.87,68.35 C51.1 54.45,69.89 58.2,69.89 59.09,69 v1(60.99,69) U20.8
  TOP w0.762: v1(20.28,8.88) 20.85,9.46 20.9,9.46 21.39,9.95 v1(23.2,9.95) D35.1 D38.1 v1(23.2,16.3) D39.1 D41.1 D43.1 D45.1 D47.1 D49.1 D51.1 v1(23.2,34.59) ; v1(64.4,28.03) 64.19,28.24 v1(61.8,28.24) ; 70.19,24 D20.1 D22.1 D24.1 D26.1 70.19,33.92 70.83,34.56 75.72,34.56 76.23,34.05 76.23,33.97 76.28,33.92 D50.1 D48.1 D46.1 D44.1 D42.1 D40.1 D37.1 D36.1 D34.1 v1(76.28,9.95) ; 70.19,24 70.13,23.94 v1(68.75,23.94) ; 70.19,24 D18.1 D16.1 D14.1 D12.1 D9.1 D6.1 70.19,9.8 v1(72.53,7.46) ; 57.95,48.94 65.84,48.94 v1(66.43,49.52) ; C45.1 v1(11.51,62.53) ; D10.1 D11.1 D13.1 D15.1 D17.1 v1(17.1,21.4) D19.1 D21.1 D23.1 D25.1 D27.1 v1(17.1,34.59) ; U2.3 52.18,9.96 51.38,9.16 v1(38.73,9.16) 38.73,10.35 39.49,11.11 v1(39.92,11.11) ; U12.3 87.46,42.46 v1(87.46,51.07) 85.86,52.67 85.86,55.91 85.12,56.65 85.12,57.74 85.68,58.3 C65.1 v1(85.68,64.03) ; v1(56.95,55.85) 56.95,54.96 57.95,53.96
  TOP w1.27: 57.95,53.96 K9.6 58.13,46.49 59.49,45.13 59.49,41.86 58.46,40.82 v1(58.46,34.21)
  BOTTOM w0.381: C49.1 50.9,68.35 ; R60.2 6.22,19.86 7.24,20.87 16.57,20.87 v1(17.1,21.4)
  BOTTOM w0.508: v1(39.92,11.11) v1(39.92,14.06) 34.45,14.06 32.44,16.07 24.11,16.07 23.88,16.3 v1(23.2,16.3) ; v1(46.82,41.95) 47.44,41.34 55.47,41.34 56.45,42.31 56.45,44.98 K9.6 ; R59.2 86.21,22.65 85.43,23.44 79.66,23.44 v1(76.26,20.03) ; v1(60.99,69) 60.99,67.76 v1(58.53,65.3) ; v1(76.28,9.95) 80.37,9.95 83.7,13.28 88.3,13.28 88.59,12.98 88.59,12.87 88.6,12.86 88.6,10.73 89.74,9.59 C78.1 ; v1(20.28,8.88) 20.28,8.2 20.33,8.15 20.33,7.15 19.95,6.77 U22.8 ; v1(86.46,69.94) 86.46,65.49 85.68,64.71 v1(85.68,64.03) ; 7.47,52.25 7.47,58.49 ; C49.1 52.9,68.37 C51.1 54.91,68.35 C48.1 ; v1(72.53,7.46) 71.84,6.77 U21.8 ; U3.3 50.35,55.62 50.96,55.01 56.19,55.01 56.95,55.77 v1(56.95,55.85)
  BOTTOM w0.762: v1(58.5,63.29) 58.5,62.27 59.53,61.24 Q1.1 57.59,60.98 56.95,60.34 v1(56.95,55.85) ; v1(62.62,24.75) 61.8,25.57 v1(61.8,28.24) 61.8,28.38 60.69,29.5 60.55,29.5 60.12,29.92 60.1,29.92 59.78,30.23 59.78,30.26 58.46,31.58 v1(58.46,34.21) ; v1(62.62,24.75) C34.1 ; v1(62.62,24.75) 63.44,23.94 v1(68.75,23.94) ; v1(20.28,8.88) 19.46,8.88 19.28,9.06 12.43,9.06 12.05,9.44 U16.3 C75.1 ; 7.47,58.49 v1(11.51,62.53) ; U12.3 v1(90,37.89) ; C78.1 U17.3 ; v1(23.2,34.59) v1(17.1,34.59) 13.8,37.89 U13.3 C74.1 8.46,38.03 7.24,39.26 5.01,39.26 4.63,39.64 4.63,43.55 6.18,45.1 R48.2 6.32,51.1 7.47,52.25
VBUS_FILT: length 13.5
  TOP w0.762: R27.3 R22.3
  BOTTOM w0.381: C40.1 61.37,58.46 61.35,58.48 Q1.3
  BOTTOM w0.762: R22.3 65.36,60.46 64.6,59.7 C40.1
VCC33A: length 39.8
  TOP w0.381: U4.23 37.97,21.25 38.35,20.87 40.67,20.87 ; 40.67,20.87 41.49,20.87 41.87,21.25 U4.17 ; 40.67,20.87 40.57,20.97 U4.19 ; 40.67,20.87 40.57,20.77 U4.10
  TOP w0.508: v1(54.44,22.4) 54.44,25.06 52.94,26.56 U1.4
  TOP w0.762: 41.49,20.87 C10.1 v1(45.09,20.87) 45.12,20.87 46.64,22.4 49.11,22.4 49.88,21.62 v1(49.88,20.36)
  BOTTOM w0.381: 51.08,22.4 51.02,22.4 50.76,22.65
  BOTTOM w0.508: v1(54.44,22.4) 51.08,22.4 50.83,22.65 C14.1 C12.1
VCC33D: length 114.6
  TOP w0.381: U4.27 35.37,17.49 36.02,16.84 U4.3 36.02,14.35 36.57,13.8 39.27,13.8 ; v1(49.87,11.22) v1(49.87,13.51) 48.8,12.44 40.63,12.44 39.27,13.8 ; 39.27,13.8 U4.8 ; v1(56.98,13.25) 56.98,18.86 57.74,19.63 64.5,19.63 66.1,21.23 66.1,40.02 59.9,46.22 v1(59.9,46.88)
  TOP w0.508: U2.4 49.87,17.41 v1(49.87,15.64) ; v1(48.83,10.1) 48.79,10.06 40.73,10.06 40.72,10.08 v1(40.04,10.08)
  BOTTOM w0.381: v1(49.87,11.22) 49.87,11.07 48.89,10.1 v1(48.83,10.1) ; 51.08,13.25 51.02,13.25 50.76,13.51 ; R13.2 39.4,10.71 v1(40.04,10.08) ; v1(59.9,46.88) 59.9,47.92 60.18,48.2 65.36,48.2 66.99,46.58 R24.1 68.56,48.61 69.81,49.85 R19.1
  BOTTOM w0.508: v1(56.98,13.25) v1(54.44,13.25) 51.08,13.25 50.83,13.51 v1(49.87,13.51) v1(49.87,15.64)
VCCMK: length 107.1
  TOP w0.381: v1(68.21,61.54) 67.75,61.99 57.94,61.99 v1(57.05,62.89)
  TOP w0.508: v1(4.22,64.38) 4.22,66.01 4.31,66.1 MK1.1 5.14,66.06 7.35,66.06 v1(8.49,64.91) ; MK2.1 89.13,66.87 v1(87.94,66.87)
  BOTTOM w0.381: 87.94,66.25 87.88,66.18 87.88,65.66 86.33,64.11 86.33,63.76 85.95,63.38 85.41,63.38 85.04,63.75 73.69,63.75 71.48,61.54 v1(68.21,61.54) ; v1(8.49,64.91) 9.63,63.77 32.09,63.77 34.14,61.71 49.36,61.71 50.53,62.89 v1(52.65,62.89)
  BOTTOM w0.508: C44.1 C42.1 89.15,64.53 87.94,65.73 v1(87.94,66.87) ; v1(52.65,62.89) v1(57.05,62.89) ; C62.1 v1(4.22,64.38)
  BOTTOM w0.762: U3.2 v1(52.65,62.89)
ADC_L: length 56.3
  TOP w0.381: U4.12 41.87,14.35 41.99,14.23 v1(41.99,13.51) ; v1(34.73,24.86) 34.57,24.86 32.42,27.02 32.42,32.5 37.22,37.3 38.33,37.3 38.37,37.27 46.65,37.27 50.27,40.89 50.27,48.02 49.74,48.56 v1(49.1,48.56)
  BOTTOM w0.381: v1(41.99,13.51) 41.99,14.88 40.99,15.88 38.96,15.88 38.27,16.57 38.27,21.32 v1(34.73,24.86)
ADC_R: length 61
  TOP w0.381: U4.13 42.52,14.35 43.36,13.51 v1(44.41,13.51) ; v1(49.1,50.84) 50.81,49.14 50.81,40.67 46.87,36.73 38.15,36.73 38.11,36.77 37.44,36.77 32.95,32.28 32.95,27.29 34.62,25.62 v1(34.73,25.62)
  BOTTOM w0.381: v1(44.41,13.51) 44.26,13.51 43.46,14.31 43.31,14.31 41.21,16.41 39.18,16.41 38.8,16.79 38.8,22.17 35.35,25.62 v1(34.73,25.62)
AMP_BYPS: length 4.9
  TOP w0.508: U5.3 54.29,31.67 54.69,31.26 v1(54.69,28.24)
AMP_OFF: length 26.7
  TOP w0.203: K9.1 55.23,46.49 56.27,45.46 56.27,31.23 57.11,30.4 U5.5 60.01,30.4 60.21,30.2 61.87,30.2 62.07,30.4 63.94,30.4 v1(64.32,30.02)
AMP_VO1: length 53.4
  TOP w0.381: v1(35.9,57.62) 40.16,57.62 40.8,58.26 40.8,58.74 40.82,58.76 40.82,62.89 v1(39.71,64)
  TOP w0.508: v1(50.63,34.84) 51.26,34.21 U5.1
  BOTTOM w0.381: v1(35.9,57.62) 34.47,56.2 34.47,39.95 39.58,34.84 v1(50.63,34.84) ; R1.2 39.66,65.02 39.69,65.05 C5.1
AMP_VO2: length 51.6
  TOP w0.381: U5.7 57.33,32.94 v1(56.98,33.29)
  TOP w0.508: U5.7 60.23,32.94 60.36,33.06 v1(61.04,33.06)
  BOTTOM w0.381: v1(56.98,33.29) 55.99,33.29 54.39,34.89 53.12,34.89 52.58,35.43 51.83,35.43 51.5,35.76 49.76,35.76 49.42,35.43 39.86,35.43 35.08,40.2 35.08,53.87 36.28,55.06 38.61,55.06 39.68,56.13 R10.2 39.68,57.32 39.69,57.33 C21.1
DAC_L: length 31.9
  TOP w0.203: v1(60.03,13.25) 60.4,13.63 60.54,13.63 61.5,14.59 v1(61.5,18.69)
  TOP w0.381: v1(43.26,25.44) 42.52,24.7 U4.16
  BOTTOM w0.203: v1(43.26,25.44) 43.41,25.44 44.24,24.61 46.38,24.61 46.76,24.99 54.01,24.99 57.87,21.13 60.64,21.13 61.88,19.88 61.88,19.07 v1(61.5,18.69)
DAC_R: length 30.1
  TOP w0.203: v1(62.36,18.69) 62.36,13.84 62.31,13.78 v1(62.31,13.25)
  TOP w0.381: v1(45.55,25.44) 45.4,25.44 44.48,24.52 43.85,24.52 43.17,23.84 U4.15
  BOTTOM w0.203: v1(62.36,18.69) 62.36,19.91 60.79,21.48 58.02,21.48 54.06,25.44 v1(45.55,25.44)
HID_MUTE: length 63.7
  TOP w0.203: v1(63.46,41.6) 63.36,41.69 K1.2 ; v1(39.45,18.59) 38.89,18.59 37.32,17.01 U4.5
  BOTTOM w0.203: v1(39.45,18.59) 39.99,18.59 40.8,17.77 66.53,17.77 70.29,21.53 70.29,39.13 68.56,40.86 64.19,40.86 v1(63.46,41.6)
HID_VOL_DOWN: length 56.3
  TOP w0.203: v1(39.45,17.06) 38.89,17.06 38.62,16.79 U4.7 ; v1(72.07,40.35) 72.07,41.11 72.07,41.11 K7.2
  BOTTOM w0.203: v1(39.45,17.06) 66.82,17.06 71,21.24 71,39.29 v1(72.07,40.35)
HID_VOL_UP: length 63.6
  TOP w0.203: v1(72.27,46.7) 72.27,47.52 K4.2 ; v1(39.45,17.82) 38.89,17.82 37.97,16.9 U4.6
  BOTTOM w0.203: v1(72.27,46.7) 72.62,46.35 72.62,41.78 70.64,39.79 70.64,21.38 66.68,17.42 40.39,17.42 39.99,17.82 v1(39.45,17.82)
HP_L: length 8
  TOP w0.762: J3.3 33.86,66.38 arc(34.23,66.45) 34.54,66.66 arc(34.75,66.8) 34.99,66.85 C5.2
  BOTTOM w0.762: R8.1 29.33,66.38 J3.3
HP_R: length 8.7
  TOP w0.762: J3.2 33.86,60.78 arc(34.19,60.71) 34.47,60.53 35.68,59.31 35.89,59.23 C21.2
  BOTTOM w0.762: J3.2 29.83,60.78 R12.1
LO_L: length 63.8
  TOP w0.381: v1(24.49,54.17) 24.49,64.13 22.24,66.38 J2.3
  TOP w0.508: C6.2 43.26,32.07 44.51,33.32 v1(45.55,33.32)
  BOTTOM w0.381: v1(24.49,54.17) 24.49,39.54 25.83,38.2 arc(26.37,37.97) 26.91,38.2 26.91,38.2 arc(27.99,38.2) 27.99,37.12 27.99,37.12 arc(27.99,36.04) 29.07,36.04 29.07,36.04 arc(30.15,36.04) 30.15,34.97 30.14,34.96 arc(29.92,34.43) 30.14,33.89 31.66,32.37 44.74,32.37 45.55,33.17 v1(45.55,33.32)
LO_R: length 54.8
  TOP w0.381: v1(23.73,54.17) 23.73,59.29 22.24,60.78 J2.2
  TOP w0.508: v1(45.55,30.78) C7.2
  BOTTOM w0.381: v1(45.55,30.78) 45.55,30.92 44.74,31.73 44.6,31.73 44.51,31.82 31.46,31.82 23.73,39.55 23.73,46.29 arc(23.51,46.83) 22.97,47.06 arc(22.21,47.82) 22.97,48.58 arc(23.73,49.34) 22.97,50.1 arc(22.21,50.87) 22.97,51.63 arc(23.51,51.85) 23.73,52.39 v1(23.73,54.17)
PCM_SSPND: length 1.7
  TOP w0.508: U4.28 34.11,22.59 34.07,22.55 v1(33.03,22.55)
PEAK_ADC_L: length 4.7
  BOTTOM w0.381: R40.1 C68.2 8.72,42.97 U13.5
PEAK_ADC_R: length 4.6
  BOTTOM w0.381: R52.1 C71.2 U16.5
PEAK_DAC_L: length 4.7
  BOTTOM w0.381: U12.5 90.25,42.97 C66.2 R39.1
PEAK_DAC_R: length 4.7
  BOTTOM w0.381: R51.1 C70.2 90,14.52 U17.5
REC_L: length 107.4
  TOP w0.381: v1(44.28,39.95) 43.43,39.1 30.84,39.1 29.19,37.45 29.19,17.89 29.04,17.73 v1(29.04,17.11)
  TOP w0.508: J4.1 39.71,48.56 v1(43.52,48.56) v1(45.68,48.56)
  BOTTOM w0.381: v1(44.28,39.95) 44.28,47.8 v1(43.52,48.56) ; J4.1 39.71,53.13 44.71,53.13 45.29,53.71 45.4,53.71 46.06,54.37 56.55,54.37 58.1,55.92 67.85,55.92 68.69,56.76 68.69,59.05 67.56,60.18 67.56,61.81 68.05,62.3 71.43,62.3 75.51,66.38 J5.3 ; C69.1 v1(29.04,17.11)
  BOTTOM w0.508: C41.1 v1(45.68,48.56)
REC_PD_L: length 58.5
  TOP w0.203: v1(12.35,52.52) 12.35,47.01 16.69,42.66 K5.2 16.69,40.63 v1(17,40.33) ; v1(12.35,55.47) 9.87,57.94 9.87,67.75 9.7,67.93 U6.2 ; K8.5 39.53,41.56 39.53,41.53 38.36,40.35 38.32,40.35 38.3,40.33 v1(19.87,40.33)
  BOTTOM w0.203: v1(17,40.33) v1(19.87,40.33) ; v1(12.35,55.47) v1(12.35,52.52)
REC_PD_R: length 77.1
  TOP w0.203: U10.2 81.97,67.93 81.67,67.63 81.67,65.52 80.7,64.56 73.26,64.56 68.76,60.06 48.24,60.06 46.77,58.59 46.77,48.08 45.18,46.49 K8.6 39.17,43.21 39.17,41.67 38.21,40.71 32.42,40.71 31.43,41.69 K6.2
REC_PU_L: length 47
  TOP w0.203: v1(19.84,46.42) 35.53,46.42 K8.2 ; U6.1 9.7,68.58 10.23,68.05 10.23,58.58 12.84,55.97 12.84,55.92 v1(13.21,55.54) ; v1(13.21,51.81) 16.69,48.33 K2.2 16.69,46.91 v1(17.18,46.42)
  BOTTOM w0.203: v1(13.21,55.54) v1(13.21,51.81) ; v1(17.18,46.42) v1(19.84,46.42)
REC_PU_R: length 74.7
  TOP w0.203: U10.1 82.11,68.58 81.31,67.78 81.31,65.67 80.55,64.91 73.11,64.91 68.62,60.42 49.34,60.42 48.09,60.42 46.41,58.74 46.41,48.23 45.03,46.85 43.53,46.85 42.88,47.5 38.46,47.5 K8.1 36.48,46.49 36.2,46.78 32.79,46.78 31.84,47.72 K3.2
REC_R: length 88.4
  TOP w0.381: v1(31.32,17.06) 31.32,17.68 29.78,19.23 29.78,37.28 31.06,38.56 44.3,38.56 45.04,39.3 v1(45.04,39.92)
  BOTTOM w0.381: J5.2 75.37,60.78 69.91,55.31 58.3,55.31 56.82,53.84 46.28,53.84 45.04,52.6 J4.4 45.04,48.84 45.03,48.83 45.03,40.56 45.04,40.54 v1(45.04,39.92)
  BOTTOM w0.508: C55.1 J4.4
USB_CC1: length 4.5
  TOP w0.203: J1.A5 39.88,5.93 v1(39.63,5.68)
  BOTTOM w0.203: R4.2 38.94,5 v1(39.63,5.68)
USB_CC2: length 3
  TOP w0.203: J1.B5 42.88,6.1 42.88,6.1 v1(42.88,5.48)
  BOTTOM w0.203: R3.2 43.26,5.1 v1(42.88,5.48)
USB_DN: length 14.9
  TOP w0.203: R2.2 36.14,10.71 35.93,10.51 35.93,5.59 36.68,4.84 39.68,4.84 40.45,5.61 40.45,5.9 40.38,5.97 J1.B7
  TOP w0.254: J1.A7 41.38,7.52 41.15,7.75 40.61,7.75 40.38,7.52 J1.B7
USB_DP: length 15.5
  TOP w0.203: v1(34.6,10.71) R5.2 35.38,10.71 35.58,10.51 35.58,5.44 36.53,4.49 39.83,4.49 40.81,5.46 40.81,5.9 40.88,5.97 40.88,6.28
  TOP w0.254: J1.A6 40.88,6.28 41.11,6.05 41.65,6.05 41.88,6.28 J1.B6
  BOTTOM w0.203: R5.2 v1(34.6,10.71)
VREF1650: length 82.9
  TOP w0.381: v1(59.95,67.73) U20.7 63.74,67.73 63.98,67.49 80,67.49 82.12,69.61 84.39,69.61 84.77,69.23 84.77,67.89 85.38,67.28 U10.6 ; v1(13.7,67.28) 12.14,67.28 12.14,67.28 U6.6
  TOP w0.508: U20.6 U20.7
  BOTTOM w0.381: v1(13.7,67.28) 14.33,67.28 16.97,64.64 23.27,64.64 28.56,69.92 31.22,69.92 31.61,69.54 58.15,69.54 v1(59.95,67.73)
VREF2500: length 17.9
  TOP w0.381: U19.3 v1(43.29,66.46)
  TOP w0.508: v1(57.02,67.73) U20.1
  BOTTOM w0.381: v1(43.29,66.46) 45,64.75 48.37,64.75 v1(48.81,65.19) 56.01,65.19 57.02,66.2 v1(57.02,67.73)
VU_ADL_D1: length 30.4
  TOP w0.203: v1(10.75,28.54) 10.75,28.01 11.94,26.81 11.94,10.15 12.15,9.95 v1(15.6,9.95)
  BOTTOM w0.203: v1(10.75,28.54) U13.1 ; v1(19.13,9.95) v1(15.6,9.95)
VU_ADL_D2: length 33.5
  TOP w0.203: v1(15.6,12.49) 12.5,12.49 12.3,12.69 12.3,28.21 7.7,32.81 U13.18
  BOTTOM w0.203: v1(19.13,12.49) v1(15.6,12.49)
VU_ADL_D3: length 32.1
  TOP w0.203: U13.17 5.68,35.35 12.66,28.37 12.66,15.23 12.86,15.03 v1(15.6,15.03)
  BOTTOM w0.203: v1(19.13,15.03) v1(15.6,15.03)
VU_ADL_D4: length 30.7
  TOP w0.203: v1(15.58,17.57) 13.21,17.57 13.01,17.77 13.01,28.52 4.36,37.17 3.85,37.17 U13.16
  BOTTOM w0.203: v1(19.13,17.57) v1(15.58,17.57)
VU_ADL_D5: length 30.2
  TOP w0.203: v1(15.58,20.11) 13.57,20.11 13.37,20.31 13.37,28.67 4.17,37.86 4.17,38.32 3.13,39.36 U13.15
  BOTTOM w0.203: v1(19.13,20.11) v1(15.58,20.11)
VU_ADL_D6: length 40
  TOP w0.203: U13.14 4.32,44.16 4.32,45.94 4.93,46.55 11.47,46.55 14.71,43.31 14.71,23.51 v1(15.58,22.65)
  BOTTOM w0.203: v1(19.13,22.65) v1(15.58,22.65)
VU_ADL_D7: length 36
  TOP w0.203: v1(15.58,25.19) 15.2,25.57 15.2,43.33 11.62,46.91 4.53,46.91 U13.13
  BOTTOM w0.203: v1(19.13,25.19) v1(15.58,25.19)
VU_ADL_D8: length 42.7
  TOP w0.203: D23.2 19.13,27.87 17.93,29.07 17.93,48 11.77,54.17 5.75,54.17 4.68,53.1 4.68,49.6 U13.12
VU_ADL_D9: length 38.6
  TOP w0.203: U13.11 4.27,51.73 4.27,53.41 5.39,54.53 11.91,54.53 18.29,48.15 18.29,33.14 18.3,33.14 18.3,31.25 19.13,30.41 D25.2
VU_ADL_D10: length 34.7
  TOP w0.203: D27.2 19.13,47.81 12.06,54.88 4.88,54.88 U13.10
VU_ADR_D1: length 18.1
  TOP w0.203: v1(25.23,9.95) 25.23,9 23.82,7.59 20.94,7.59 20.88,7.53 19.72,7.53 19.67,7.59 12.78,7.59 11.89,6.7 11.89,5.5 U16.1
VU_ADR_D2: length 27.1
  TOP w0.203: U16.18 6.71,7.94 19.81,7.94 19.87,7.89 20.74,7.89 20.79,7.94 23.36,7.94 24.39,8.97 24.39,11.5 25.23,12.34 v1(25.23,12.49)
VU_ADR_D3: length 28.3
  TOP w0.203: U16.17 4.53,8.3 19.96,8.3 20.01,8.25 20.59,8.25 20.64,8.3 23.21,8.3 24.03,9.12 24.03,13.69 25.23,14.88 v1(25.23,15.03)
VU_ADR_D4: length 28.2
  BOTTOM w0.203: U16.16 4.74,11.05 4.74,11.68 4.96,11.9 4.96,15.13 7.98,18.15 24.64,18.15 v1(25.23,17.57)
VU_ADR_D5: length 26.5
  BOTTOM w0.203: v1(25.23,20.11) 23.63,18.51 7.83,18.51 4.6,15.28 4.6,13.45 U16.15
VU_ADR_D6: length 40.3
  BOTTOM w0.203: U16.14 4.93,16.32 4.93,23.13 7.7,25.9 9.36,25.9 9.36,25.9 10.91,25.9 12.73,27.72 12.73,28.5 15.47,31.23 22.26,31.23 24.31,29.18 24.31,23.56 v1(25.23,22.65)
VU_ADR_D7: length 36.1
  BOTTOM w0.203: U16.13 4.58,18.51 4.58,23.28 7.56,26.26 10.76,26.26 12.38,27.87 12.38,28.64 15.32,31.59 22.41,31.59 24.67,29.33 24.67,25.75 v1(25.23,25.19)
VU_ADR_D8: length 32
  BOTTOM w0.203: U16.12 4.02,20.49 4.02,21.56 4.17,21.71 4.17,23.38 7.41,26.61 10.62,26.61 12.02,28.02 12.02,28.79 15.25,32.02 22.54,32.02 25.23,29.33 v1(25.23,27.73)
VU_ADR_D9: length 28.6
  BOTTOM w0.203: U16.11 3.13,23.16 3.5,23.52 3.82,23.52 7.26,26.97 10.47,26.97 11.66,28.16 11.66,28.94 15.13,32.4 23.63,32.4 25.23,30.8 v1(25.23,30.27)
VU_ADR_D10: length 25.9
  BOTTOM w0.203: U16.10 4.47,24.68 7.11,27.32 10.32,27.32 11.31,28.31 11.31,29.09 15.03,32.81 v1(25.23,32.81)
VU_DAL_D1: length 36.3
  BOTTOM w0.203: v1(72.22,9.95) 74.86,9.95 75.11,10.2 75.11,22.27 84.23,31.39 90.61,31.39 U12.1
VU_DAL_D2: length 26.7
  BOTTOM w0.203: v1(72.22,12.49) 74.56,12.49 74.76,12.69 74.76,22.42 83.5,31.16 83.5,31.89 U12.18
VU_DAL_D3: length 26.5
  BOTTOM w0.203: v1(72.22,15.03) 74.2,15.03 74.4,15.23 74.4,22.57 83.14,31.31 83.14,34.08 U12.17
VU_DAL_D4: length 26.3
  BOTTOM w0.203: v1(72.22,17.57) 73.84,17.57 74.05,17.77 74.05,22.72 82.78,31.45 82.78,36.26 U12.16
VU_DAL_D5: length 26.1
  BOTTOM w0.203: v1(72.22,20.11) 73.49,20.11 73.69,20.31 73.69,22.86 82.43,31.6 82.43,38.45 U12.15
VU_DAL_D6: length 25.9
  BOTTOM w0.203: v1(72.22,22.65) 73.13,22.65 73.34,22.85 73.34,23.01 82.07,31.75 82.07,39.43 83.34,40.7 83.34,41.9 U12.14
VU_DAL_D7: length 27
  BOTTOM w0.203: v1(72.22,25.19) 75.01,25.19 81.72,31.89 81.72,39.58 82.99,40.85 82.99,44.09 U12.13
VU_DAL_D8: length 25.9
  BOTTOM w0.203: v1(72.22,27.73) 73.11,27.73 73.31,27.93 73.31,31.68 82.63,41 82.63,46.27 U12.12
VU_DAL_D9: length 25.7
  BOTTOM w0.203: U12.11 82.28,48.46 82.28,41.15 72.96,31.82 72.96,30.47 72.75,30.27 v1(72.22,30.27)
VU_DAL_D10: length 26.1
  BOTTOM w0.203: U12.10 81.92,50.64 81.92,41.29 73.44,32.81 v1(72.22,32.81)
VU_DAR_D1: length 17.9
  TOP w0.203: U17.1 90.51,2.84 84.46,2.84 78.31,8.98 D31.2
VU_DAR_D2: length 10.7
  TOP w0.203: D34.2 78.31,12.34 79.06,11.6 79.2,11.6 83.24,7.56 83.24,5.53 U17.18
VU_DAR_D3: length 10.7
  TOP w0.203: U17.17 83.27,8.04 83.27,10.08 79.2,14.14 79.06,14.14 78.31,14.88 D36.2
VU_DAR_D4: length 10.7
  TOP w0.203: U17.16 83.24,10.61 83.24,12.5 78.31,17.42 D37.2
VU_DAR_D5: length 11.8
  TOP w0.203: U17.15 82.81,13.58 82.81,17.65 80.35,20.11 D40.2
VU_DAR_D6: length 10.7
  TOP w0.203: U17.14 83.17,15.77 83.17,17.8 79.2,21.76 79.06,21.76 78.31,22.5 D42.2
VU_DAR_D7: length 11.6
  TOP w0.203: D44.2 80.02,25.19 82.78,22.42 82.78,18.69 U17.13
VU_DAR_D8: length 10.7
  TOP w0.203: U17.12 83.22,20.79 83.22,22.68 78.31,27.58 D46.2
VU_DAR_D9: length 11.7
  TOP w0.203: D48.2 79.91,30.27 83.47,26.71 83.47,25.21 83.37,25.11 83.37,24.25 83.47,24.15 83.47,23.08 U17.11
VU_DAR_D10: length 10.7
  TOP w0.203: D50.2 78.31,32.66 84.41,26.57 U17.10
XTAL1: length 10.3
  TOP w0.203: U4.21 39.27,23.8 39.5,24.03 39.5,25.1 39.15,25.44 R15.2 38.69,26.4 38.89,26.6 39.33,26.6 39.53,26.8 39.53,27.24 39.77,27.48 39.77,28.13 39.69,28.22 39.41,28.25 Y1.2 C23.1
XTAL2: length 10.6
  TOP w0.203: U4.20 39.92,23.8 39.85,23.87 39.85,25.1 40.2,25.44 R15.1 40.72,26.4 40.52,26.6 40.09,26.6 39.88,26.8 39.88,27.09 40.12,27.33 40.12,28.26 39.97,28.44 40,28.73 Y1.1 ; 41,29.53 Y1.1 ; Y1.1 C31.1
N368212: length 3
  TOP w0.203: U4.1 34.72,14.38 34.87,14.24 34.87,12.98 R5.1
N368216: length 3.9
  TOP w0.203: R2.1 36.39,12.74 35.22,13.91 35.22,14.24 35.37,14.38 U4.2
N368937: length 1.6
  TOP w0.203: K1.1 62.16,45.97 61.93,46.2 v1(61.93,46.88)
N369524: length 1.6
  TOP w0.203: v1(71.84,52.93) 71.84,52.23 72.07,52 K4.1
N369632: length 2.3
  TOP w0.203: K7.1 72.07,45.97 71.46,46.58 v1(70.59,46.58)
N370784: length 7.3
  TOP w0.381: U4.26 36.02,18.96 36.05,18.93 v1(36.05,18.31) 36.67,17.69 U4.4
N375078: length 1.7
  TOP w0.508: v1(44.79,15.79) 43.97,15.79 43.78,15.59 U4.14
N381398: length 5.6
  TOP w0.508: U5.2 51.68,32.94 51.55,32.81 v1(50.63,32.81)
  BOTTOM w0.508: v1(47.58,33.32) 50.12,33.32 v1(50.63,32.81)
N381406: length 14.1
  TOP w0.508: v1(61.04,31.03) 59.67,31.03 59.04,31.67 U5.6 56.98,31.67 v1(56.93,31.62)
  BOTTOM w0.508: R9.1 56.09,30.78 v1(56.93,31.62)
N385645: length 67.1
  TOP w0.381: R37.2 60.53,3.74 61.34,4.55 61.48,4.55 61.6,4.67 63.73,4.67 63.93,4.47 63.93,2.73 64.13,2.53 65.76,2.53 66.83,3.6 70.59,3.6 70.67,3.69 71.27,3.69 71.35,3.61 76.76,3.61 76.77,3.6 81.39,3.6 v1(81.85,3.14) ; v1(85.99,10.53) 85.99,26.59 85.05,27.53 85.05,29.79 85.99,30.73 85.99,39.26 v1(87.46,40.73)
  BOTTOM w0.381: v1(81.85,3.14) 85.27,3.14 85.99,3.85 v1(85.99,10.53)
N385649: length 28.3
  BOTTOM w0.381: D7.1 79.08,4.56 78.14,5.5 U21.2 75.27,5.5 74.35,4.58 74.35,3.36 73.29,2.3 69.58,2.3 68.93,2.95 59.15,2.95 v1(58.5,3.6)
  BOTTOM w0.508: v1(58.5,3.6) R45.2
N385661: length 5.5
  BOTTOM w0.381: D4.1 D7.2 77.9,6.58 77.71,6.77 U21.1
N385748: length 3
  BOTTOM w0.508: C67.2 59.88,11.22 58.5,9.84 R45.1
N390153: length 4.6
  BOTTOM w0.203: R47.1 U12.9
N392729: length 4.7
  BOTTOM w0.203: R42.1 91.88,48.2 U12.7
  BOTTOM w0.381: U12.6 U12.7
N394781: length 9.7
  TOP w0.203: R41.3 90.8,56.47 90.8,51.82 U12.8
  BOTTOM w0.203: U12.8 91.67,50.23 R42.2
N398230: length 27.5
  TOP w0.381: R49.2 66.07,3.6 67.58,5.11 D28.2 67.58,7.36 68.41,8.18 68.61,8.18 68.68,8.25 v1(70.19,8.25)
  BOTTOM w0.381: R51.2 86.26,12.24 84.88,10.85 83.03,10.85 80.42,8.25 v1(70.19,8.25)
N398274: length 15.3
  BOTTOM w0.381: v1(62.82,3.6) 66.38,7.16 D30.1 67.58,6.04 69.39,4.23 U21.6
  BOTTOM w0.508: R57.2 61.55,4.87 v1(62.82,3.6)
N398290: length 9.3
  BOTTOM w0.381: U21.7 69.77,5.5 69.17,6.11 69.17,7.45 68.33,8.3 65.3,8.3 v1(64.15,7.16)
N398848: length 2.6
  BOTTOM w0.508: C72.2 61.55,10.46 R57.1
N398910: length 4.6
  BOTTOM w0.203: R59.1 U17.9
N414849:
  vias: v1(47.83,3.09)
N424969: length 3.2
  TOP w0.381: MK1.4 7.4,66.89 7.8,67.28 7.83,67.28 7.83,67.28 U6.3
N428607: length 3.4
  TOP w0.381: U6.5 11.51,66.54 v1(12.35,66.54)
  BOTTOM w0.381: C37.1 13.01,67.2 v1(12.35,66.54)
N435350: length 35.3
  TOP w0.381: v1(15.04,68.7) 15.91,67.83 24.95,67.83 27.03,69.92 39.91,69.92 41.03,68.8 41.03,63.75 v1(41.74,63.04)
  BOTTOM w0.381: v1(41.74,63.04) R21.2
N437586: length 59.4
  TOP w0.203: v1(26.65,35.1) v1(26.65,6.44)
  BOTTOM w0.203: R40.2 6.32,40.68 7.07,39.94 7.46,39.94 7.78,39.62 10.09,39.62 10.32,39.39 11.18,39.39 11.41,39.62 22.84,39.62 26.65,35.81 v1(26.65,35.1) ; D5.2 27.37,6.44 v1(26.65,6.44)
  BOTTOM w0.381: R38.2 29.9,6.26 29,7.16 D5.2
N437630: length 13.4
  TOP w0.381: v1(25.25,5.5) 25.69,5.06 25.69,5.01 v1(27.87,2.84) 28.35,3.32 28.35,5.77 28.09,6.04 D8.1 28.09,8.27 27.87,8.49 v1(27.87,10.71)
  BOTTOM w0.381: U22.2 v1(25.25,5.5)
N437646: length 8.7
  BOTTOM w0.381: v1(31.52,7.16) 29.97,7.16 28.83,8.3 27.34,8.3 25.82,6.77 U22.1
N438198: length 2.9
  BOTTOM w0.508: C69.2 29.04,13.77 28.02,12.74 R46.1
N438260: length 4.6
  TOP w0.203: v1(6.28,53.13) U13.9
  BOTTOM w0.203: R48.1 v1(6.28,53.13)
N438518: length 38.6
  TOP w0.381: v1(13.19,3.1) 14.8,1.49 32.79,1.49 33.99,2.69 33.99,2.84
  BOTTOM w0.381: R52.2 6.18,11.59 5.19,10.6 5.19,5.33 7.41,3.1 v1(13.19,3.1)
N438562: length 26.2
  BOTTOM w0.381: D33.1 17.11,4.23 U22.6 19.63,4.23 21.57,2.3 26.04,2.3 26.57,1.77 30.92,1.77 v1(31.96,2.81) 32.46,3.31 32.46,8.1 31.96,8.6 R58.2
N438578: length 5.7
  BOTTOM w0.381: D29.1 14.87,6.53 14.89,6.56 D33.2 17.06,5.5 U22.7
N439118: length 2.5
  BOTTOM w0.508: C73.2 31.32,13.38 R58.1
N439180: length 6.7
  BOTTOM w0.203: R60.1 6.08,23.31 7.45,24.68 U16.9
N493207: length 6.2
  TOP w0.381: v1(45.29,63.04) 45.29,66.72 45.24,66.77 45.24,67.01 44.52,67.73 U19.2
N493759: length 21.3
  TOP w0.381: J4.2 43.26,54.15 R18.1 43.26,63.18 41.84,64.6 41.84,68.52 42.32,69 U19.1
N495972: length 7.1
  TOP w0.203: R30.1 49.61,63.99 50.2,64.57 50.2,66.2 49.94,66.46 U19.6 47.2,66.46 v1(46.82,66.08)
N495980: length 22.2
  TOP w0.203: v1(46.82,68.12) 47.2,67.73 U19.7
  TOP w0.381: v1(46.82,68.12) 46.17,67.47 46.17,65.81 46.34,65.65 46.34,62.29 45.97,61.92 44.51,61.92 43.8,61.21 43.8,52.14 J4.3
N496124: length 8.9
  TOP w0.381: MK2.4 90.85,66.17 90.43,65.75 85.35,65.75 84.69,66.41 84.69,66.95 84.35,67.28 U10.3
N496194: length 2.8
  TOP w0.381: v1(87.51,68.65) 87.51,67.66 86.48,66.63 U10.5
N496198: length 45.7
  BOTTOM w0.381: v1(47.58,62.98) 49.1,64.51 61.09,64.51 61.24,64.36 61.26,64.36 61.46,64.16 61.46,64.14 61.47,64.13 61.47,62.59 61.94,62.12 63.2,62.12 63.58,62.5 63.58,63.87 64.52,64.81 69.93,64.81 70.64,65.52 70.64,66.64 73.92,69.92 84.4,69.92 85.48,68.84 C54.2
N522042: length 2.7
  BOTTOM w0.381: Q1.2 61.53,61.24 60.53,62.24 v1(60.53,63.29)
N529139: length 57.6
  TOP w0.203: v1(38.64,37.91) 31.38,37.91 30.46,37 30.46,27.14 v1(33.03,24.58) ; v1(51.62,40.38) 51.62,49.22 v1(52.28,49.88)
  BOTTOM w0.203: Q3.2 62.33,51.35 60.86,49.88 v1(52.28,49.88) ; v1(51.62,40.38) 51.62,38.93 50.6,37.91 v1(38.64,37.91)
N529191:
  vias: v1(64.34,51.61)
N529733:
  vias: v1(66.38,51.61)
N534103: length 8.7
  TOP w0.203: R22.2 64.6,66.08 64.37,65.85 59.51,65.85 58.9,66.46 U20.3
N535581: length 7.5
  TOP w0.203: R27.2 68.23,64.89 64.6,64.89 64.29,65.19 U20.5
N549531:
  vias: v1(56.47,51.61)
N551342: length 8.6
  TOP w0.203: K9.5 54.44,48.01 D2.1
N611370: length 9.8
  TOP w0.203: R53.3 90.8,28.03 90.8,23.37 U17.8
  BOTTOM w0.203: R54.2 90.76,21.89 91.01,22.14 U17.8
N611382: length 4.9
  BOTTOM w0.203: U17.7 91.01,19.6 90.76,19.86 R54.1
  BOTTOM w0.381: U17.6 U17.7
N612780: length 9.8
  BOTTOM w0.203: R44.2 9.48,50.34 9.73,50.59 U13.8 8.72,52.62 R43.3
N612792: length 4.9
  BOTTOM w0.203: R44.1 9.48,48.3 9.73,48.05 U13.7
  BOTTOM w0.381: U13.6 U13.7
N613572: length 9.8
  TOP w0.203: R55.3 8.72,24.17 U16.8
  BOTTOM w0.203: U16.8 9.73,22.14 9.48,21.89 R56.2
N613584: length 4.9
  TOP w0.381: U16.7 U16.6
  BOTTOM w0.203: U16.7 9.73,19.6 9.48,19.86 R56.1

## Text on the board
Ref Des/Silkscreen Top: MIC->ADC | H | L | DACOUT | MIC L | CLIP | R | AMPOUT | MIC R | dBFS | -0 | -3 | -6 | -9 | -12 | -15 | -18 | -21 | -24 | -27 | MIC LR | SYNC | LPCM Audio Interface | SYS | PWR | ON/STBY | PH-AMP | PCM ON | MUTE | LIN/MO | PB LR | RECORD | PLAYBACK | SANTORINI
